# EAGLE board uCboard (EAGLE 6.6.0)

Size 100 x 80 mm. Coordinates in mm from the lower left corner, seen from the top.
Outline: 0,0 100,0 100,80 0,80 0,0
Copper layers (1*16): Top 0.035mm / dielectric 1.5mm / Bottom 0.035mm
Design rules "default": minimum track width 10mil, minimum drill 24mil, track to track 8mil, track to pad 8mil, pad to pad 8mil, via to via 8mil, smd to smd 8mil, copper to edge 40mil, drill to drill 8mil, minimum pad ring 10mil, minimum via ring 8mil, stop-mask expansion 4mil, vias tented up to drill 0mil, thermal gap 10mil

## Footprints (pad centres in the part's own frame; a part is rotated, then mirrored left to right if it is on the bottom)
C0805 = smd 1.3 x 1.5: 1 -0.95,0; 2 0.95,0
62221 = drill 0.8 pad 2.54: 1 0,0
SO28W = smd 0.66 x 2.032: 1 -8.255,-5.029; 2 -6.985,-5.029; 3 -5.715,-5.029; 4 -4.445,-5.029; 5 -3.175,-5.029; 6 -1.905,-5.029; 7 -0.635,-5.029; 8 0.635,-5.029; 9 1.905,-5.029; 10 3.175,-5.029; 11 4.445,-5.029; 12 5.715,-5.029; 13 6.985,-5.029; 14 8.255,-5.029; 15 8.255,5.029; 16 6.985,5.029; 17 5.715,5.029; 18 4.445,5.029; 19 3.175,5.029; 20 1.905,5.029; 21 0.635,5.029; 22 -0.635,5.029; 23 -1.905,5.029; 24 -3.175,5.029; 25 -4.445,5.029; 26 -5.715,5.029; 27 -6.985,5.029; 28 -8.255,5.029
SOT223 = smd 1.219 x 2.235: 1 -2.311,-3.099; 2 0,-3.099; 3 2.311,-3.099 | smd 3.6 x 2.2: 4 0,3.099
R0805 = smd 1.3 x 1.5: 1 -0.95,0; 2 0.95,0

## Placement (x,y rotation side)
C1  100nF  [C0805]  -35.56,16.51 0 top  (outside the outline)
C2  100nF  [C0805]  -17.78,27.94 0 top  (outside the outline)
C3  100nF  [C0805]  -25.4,27.94 0 top  (outside the outline)
C4  [C0805]  -45.72,-13.97 0 top  (outside the outline)
C5  [C0805]  -45.72,-19.05 0 top  (outside the outline)
C7  10uF  [C0805]  -31.75,27.94 0 top  (outside the outline)
GND  PIN1-2  [62221]  -62.23,-13.97 0 top  (outside the outline)
IC1  PIC24FJXXGA002/SO  [SO28W]  48.26,38.1 270 top
IC2  317EMP  [SOT223]  -44.45,5.08 0 top  (outside the outline)
R1  10k  [R0805]  -36.83,27.94 0 top  (outside the outline)
R2  220  [R0805]  -15.24,33.02 0 top  (outside the outline)
R3  470  [R0805]  -45.72,-3.81 0 top  (outside the outline)
R4  770,8  [R0805]  -45.72,-8.89 0 top  (outside the outline)
VDD  12V  [62221]  -53.34,-13.97 0 top  (outside the outline)

## Library data of the parts
C1-C5 C7 = eagle-ltspice; SPICEMODEL: NONE; SPICEPREFIX: C
GND VDD = con-faston; MF: TYCO ELECTRONICS; MPN: 62221-1; OC_FARNELL: unknown; OC_NEWARK: 16H2318
IC1 = pic24gagb
IC2 = linear
R1-R4 = eagle-ltspice; SPICEMODEL: NONE; SPICEPREFIX: R

## Nets
3.3V: C4.2 IC2.4 R1.2 R3.2
GND: C1.2 C4.1 C5.1 C7.1 GND.1 R4.1
N$1: C1.1 R1.1 R2.1
N$2: IC1.1 R2.2
N$3: C7.2 IC1.20
N$4: C3.2 IC1.13
N$5: C2.2 IC1.28
N$7: C3.1 IC1.8
N$8: C2.1 IC1.27
N$9: C5.2 IC2.3 VDD.1
N$11: IC2.1 R3.1 R4.2

## Tracks (layer width: path | path; a pad name or v marks a point on that pad's centre or on a via)
3.3V  (3 unrouted)
GND  (5 unrouted)
N$1  (2 unrouted)
N$2  (1 unrouted)
N$3  (1 unrouted)
N$4  (1 unrouted)
N$5  (1 unrouted)
N$7  (1 unrouted)
N$8  (1 unrouted)
N$9  (2 unrouted)
N$11  (2 unrouted)